# Altium PCB mainpcb.PcbDoc
Units mil, origin at the board's own origin, x right, y up, seen from the top; angles counter-clockwise.
Board outline 1960.42 x 1966.85 mil, 2 copper layers (Top Layer, Bottom Layer); 84 components, 58 nets, 271 pads, 70 vias.
Unrouted connection lines stored in the file: 12.
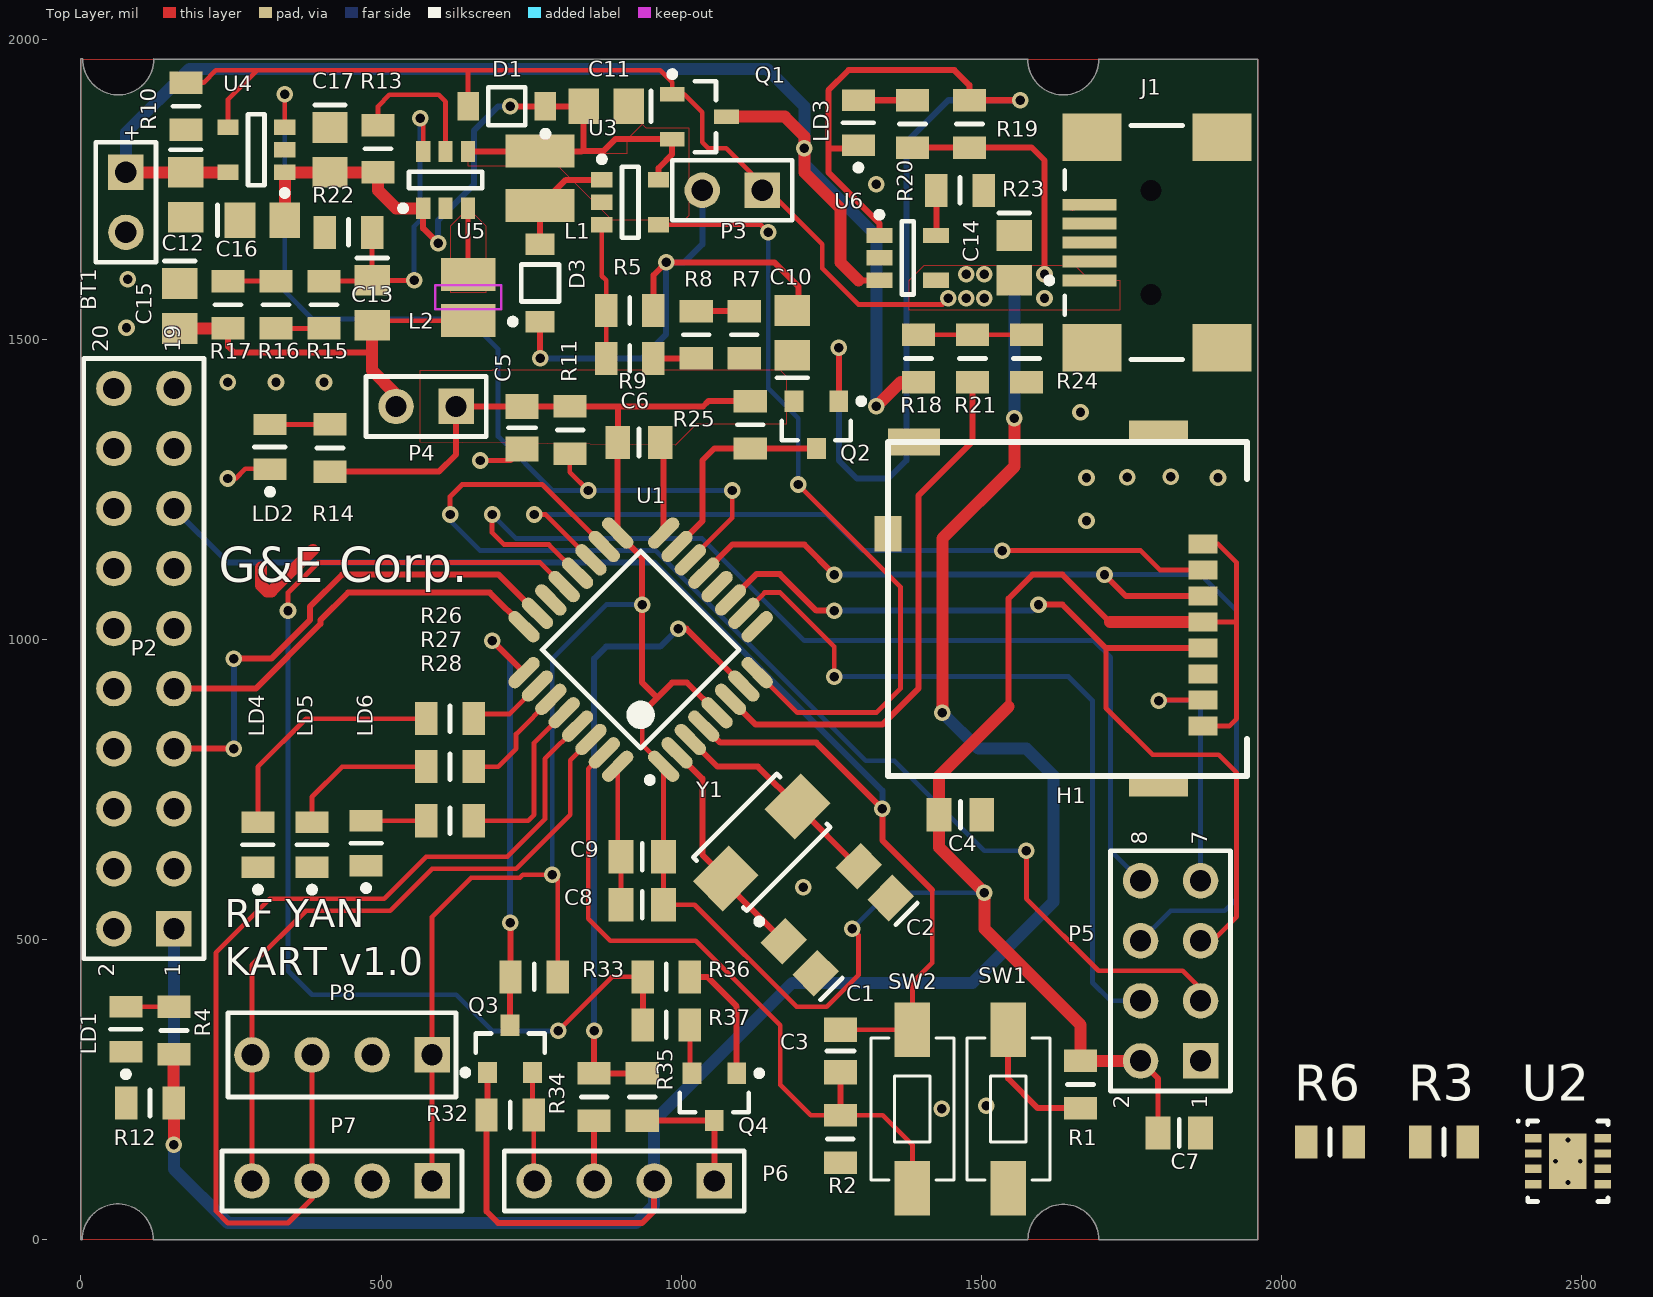
[diagram p0: Top Layer view]
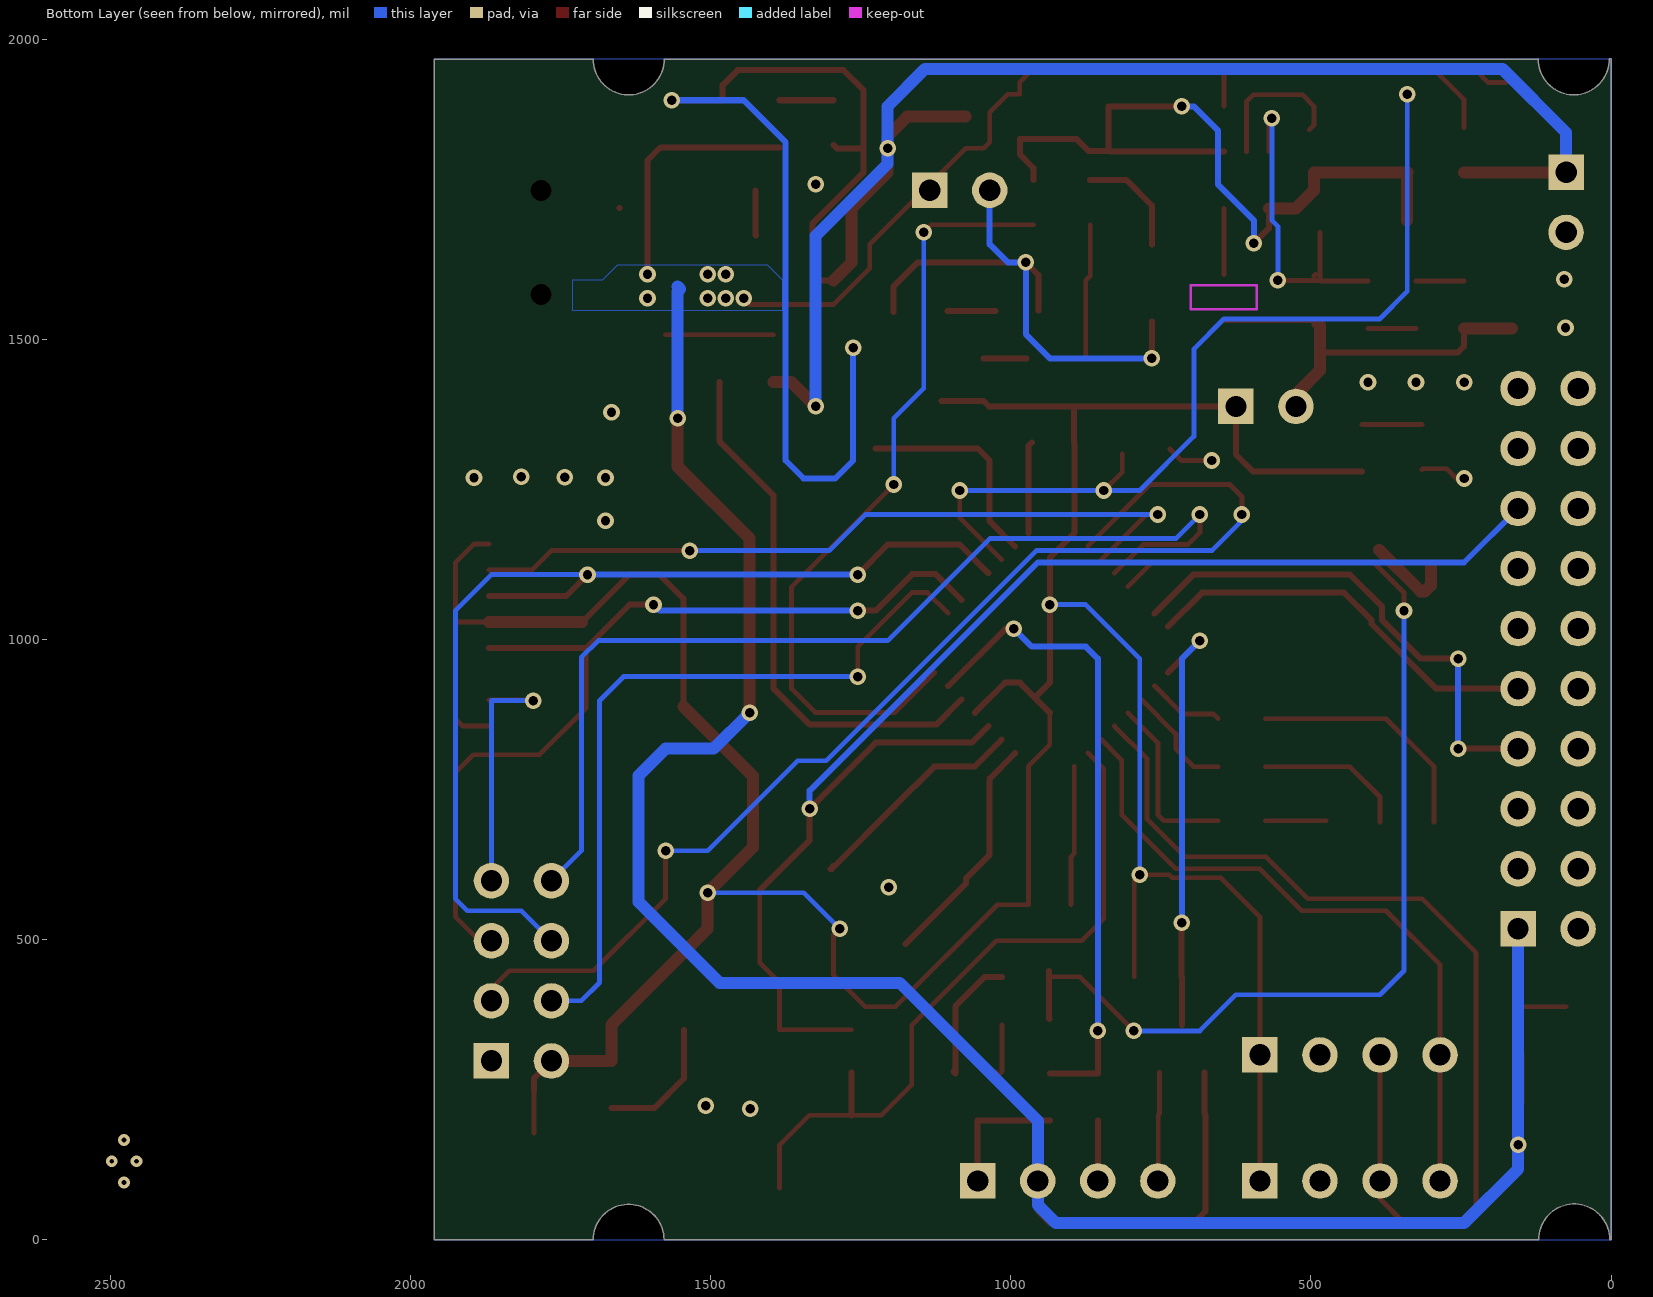
[diagram p1: Bottom Layer view, seen from below]
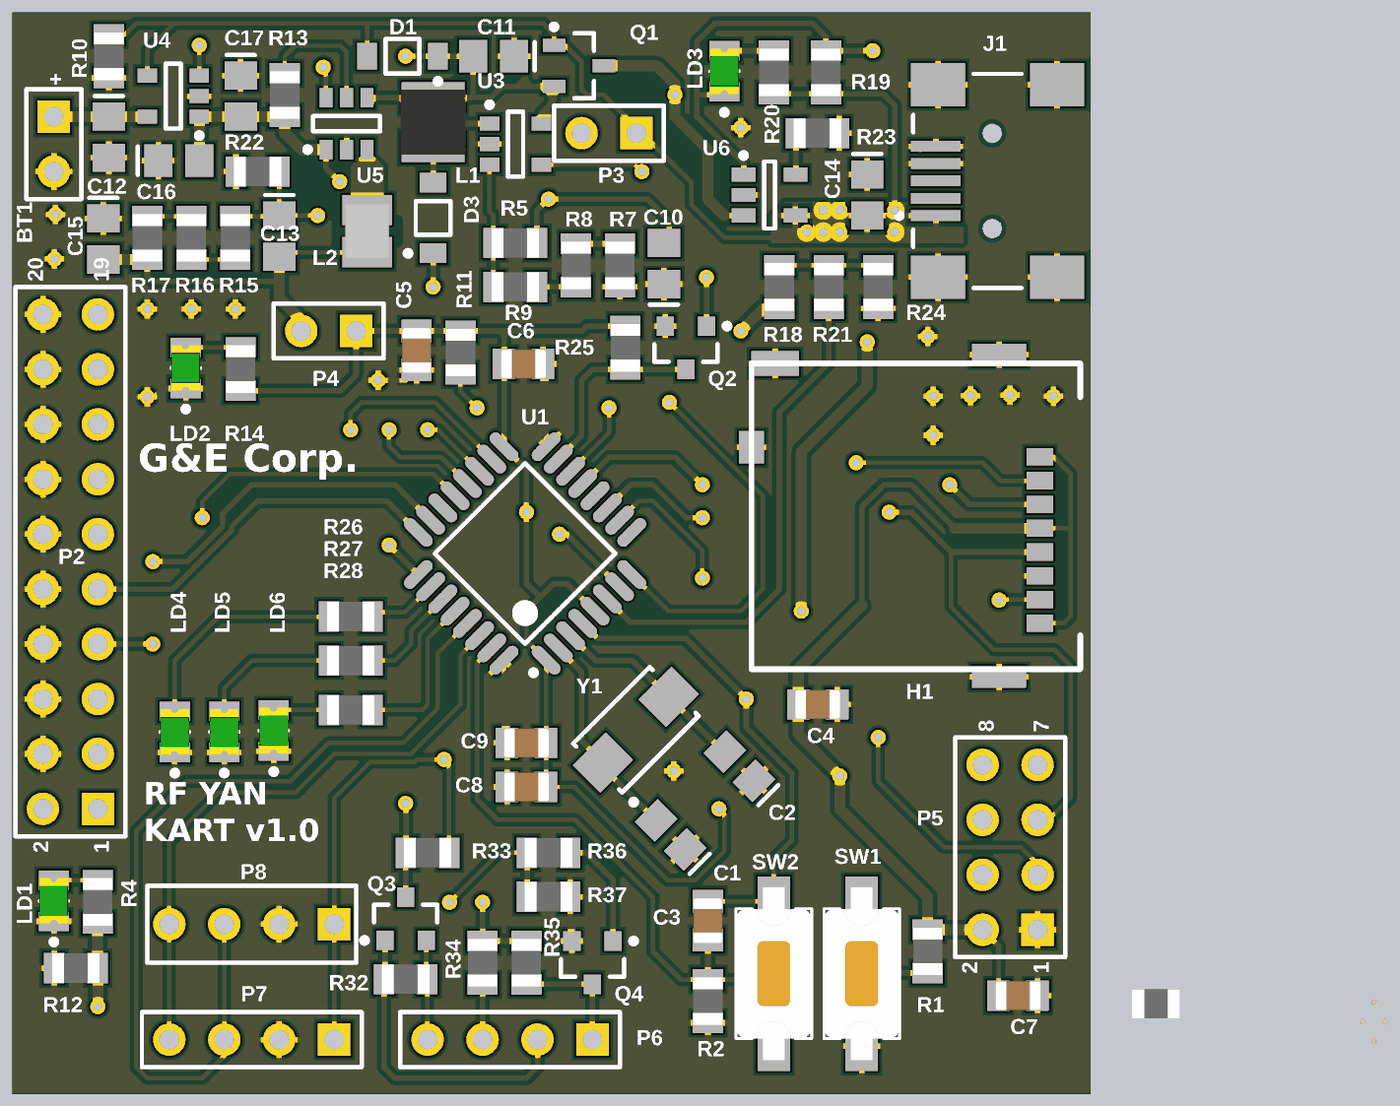
[diagram p2: 3D render of the assembled board from above, using the file's embedded part models]

## Layer stack, top to bottom
Top Solder: solder mask 0.4, Solder Resist, Dk 3.5
Top Layer: signal copper 1.4
Dielectric 1: dielectric 12.6, FR-4, Dk 4.8
Bottom Layer: signal copper 1.4
Bottom Solder: solder mask 0.4, Solder Resist, Dk 3.5

## Board outline
0,0 0,1966.75 -0.02,1966.78 2.99,1966.78 ccw(c62.09,1966.15) 121.19,1966.78 121.26,1966.7 1577.13,1966.7 ccw(c1636.23,1966.07) 1695.32,1966.7 1960.4,1966.7 1960.4,-0.07 1695.47,-0.07 1695.4,0.01 ccw(c1636.3,0.01) 1577.2,0.01 1577.12,0 120.5,0 ccw(c61.4,0.63) 2.31,0

## Design rules (kind name [scope] priority, off if disabled: settings)
Clearance Clearance_4 [InNamedPolygon('NONET_L01_P018')] p1: gap=8 ignorepadtopadclearanceinfootprint=FALSE
Clearance Clearance_2 [InNamedPolygon('GND_L02_P015')] p2: gap=8 ignorepadtopadclearanceinfootprint=FALSE
Clearance Clearance_3 [InNamedPolygon('NONET_L01_P013')] p3: gap=8 ignorepadtopadclearanceinfootprint=FALSE
Clearance Clearance_1 [InNamedPolygon('NONET_L01_P000')] p4: gap=7 ignorepadtopadclearanceinfootprint=FALSE
Clearance [All] p5: gap=7 ignorepadtopadclearanceinfootprint=FALSE
ComponentClearance [All] p1: gap=1 collisioncheckmode=3 verticalgap=10 showdistances=FALSE
MinimumSolderMaskSliver [All] p1: minsoldermaskwidth=0
PolygonConnect PolygonConnect_4 [All vs IsNamedPolygon('NONET_L01_P013')] p1: connectstyle=Relief reliefconductorwidth=10 reliefentries=4 polygonreliefangle="90 Angle" airgapwidth=8
PolygonConnect PolygonConnect_3 [All vs IsNamedPolygon('NONET_L01_P018')] p2: connectstyle=Relief reliefconductorwidth=10 reliefentries=4 polygonreliefangle="90 Angle" airgapwidth=8
PolygonConnect PolygonConnect_2 [All vs IsNamedPolygon('NETC13_2_L01_P010')] p3: connectstyle=Relief reliefconductorwidth=10 reliefentries=4 polygonreliefangle="90 Angle" airgapwidth=7
PolygonConnect PolygonConnect_1 [All vs IsNamedPolygon('GND_L01_P006')] p4: connectstyle=Relief reliefconductorwidth=10 reliefentries=4 polygonreliefangle="90 Angle" airgapwidth=10
PolygonConnect [All vs IsNamedPolygon('VBAT_L01_P003')] p5: thpad.connectstyle=Direct thpad.reliefconductorwidth=10 thpad.reliefentries=4 thpad.polygonreliefangle="90 Angle" thpad.airgapwidth=10 smdpad.connectstyle=Relief smdpad.reliefconductorwidth=7 smdpad.reliefentries=4 smdpad.polygonreliefangle="90 Angle" smdpad.airgapwidth=7 via.connectstyle=Relief via.reliefconductorwidth=10 via.reliefentries=4 via.polygonreliefangle="90 Angle" via.airgapwidth=10
PolygonConnect PolygonConnect_7 [All vs IsNamedPolygon('NONET_L01_P000')] p6: thpad.connectstyle=Direct thpad.reliefconductorwidth=10 thpad.reliefentries=4 thpad.polygonreliefangle="90 Angle" thpad.airgapwidth=10 smdpad.connectstyle=Relief smdpad.reliefconductorwidth=10 smdpad.reliefentries=4 smdpad.polygonreliefangle="90 Angle" smdpad.airgapwidth=10 via.connectstyle=Direct via.reliefconductorwidth=10 via.reliefentries=4 via.polygonreliefangle="90 Angle" via.airgapwidth=10
RoomDefinition Designator_2 [InComponentClass('Designator')] p1: confinementstyle=ConfineIn formatcopy=TRUE lockcomponents=FALSE outline -5825.2,-4042 -3825.2,-4042 -3825.2,-3042 -5825.2,-3042
RoomDefinition Designator_1 [InComponentClass('Designator')] p2: confinementstyle=ConfineIn formatcopy=TRUE lockcomponents=FALSE outline -5825.2,-4042 -3825.2,-4042 -3825.2,-3042 -5825.2,-3042
RoomDefinition Designator [InComponentClass('Designator')] p3: confinementstyle=ConfineIn formatcopy=TRUE lockcomponents=FALSE outline -5825.2,-4042 -3825.2,-4042 -3825.2,-3042 -5825.2,-3042
RoutingVias [All] p1: holewidth=28 width=50 viastyle="Through Hole" minholewidth=28 minwidth=50 maxholewidth=28 maxwidth=50
SilkToSilkClearance [All] p1: silktosilkclearance=2
SilkToSolderMaskClearance [IsPad] p1: minsilkscreentomaskgap=0 clearancetoexposedcopper=FALSE
SolderMaskExpansion [All] p1: expansion=4
Width [All] p1: maxlimit=50 minlimit=6 preferedwidth=20 minimp=50.000000 maximp=50.000000 favimp=50.000000
26 further rules are at their usual default settings.

## Classes and differential pairs
component class Designator: H1 K1 P5 P6 P7 P8 Q3 Q4 R32 R33 R34 R35 R36 R37

## Components (designator, comment, footprint, x,y, rotation, side; value= is the part's Value field where it differs from the comment)
BT1 "Battery" BAT-2 74.8,1728 r270 top
C1 "C0805" 0805 1197.07,470.73 r135 top value=18pF
C2 "C0805" 0805 1322.07,595.73 r135 top value=18pF
C3 "22pF" CAPC2012X135N 1264.8,314.46 r90 top
C4 "100nF" CAPC2012X135N 1464.8,708 r180 top
C5 "100nF" CAPC2012X135N 734.8,1352.57 r90 top
C6 "100nF" CAPC2012X135N 929.37,1328 r180 top
C7 "100nF" CAPC2012X135N 1829.37,178 r180 top
C8 "100nF" CAPC2012X135N 934.8,558 r0 top
C9 "100nF" CAPC2012X135N 934.8,638 r0 top
C10 "C0805" 0805 1184.8,1510.6 r90 top value=10uF
C11 "C0805" 0805 874.8,1888 r180 top value=10uF
C12 "C0805" 0805 302.2,1698 r0 top value=10uF
C13 "C0805" 0805 484.8,1560.6 r270 top value=22pF
C14 "C0805" 0805 1554.8,1635.4 r270 top value=10uF
C15 "C0805" 0805 164.8,1555.4 r270 top value=10uF
C16 "C0805" 0805 174.8,1740.6 r270 top value=10uF
C17 "C0805" 0805 414.8,1815.4 r270 top value=10uF
D1 "PMEG2010AEH" ONSC-SOD-123-2-425-04_V 709.17,1888 r180 top
D3 "PMEG2010AEH" ONSC-SOD-123-2-425-04_V 764.8,1593.63 r90 top
H1 "SDKART" PCBComponent_1 1394.01,1328.87 r270 top
J1 "440478-2" 440478 1988.85,1660.99 r0 top
L1 "74404032047" "WE-LQS 3015" 764.8,1768 r270 top
L2 "74438322022" "SMD 2508" 644.8,1569.61 r270 top
LD1 "Green" LED_OSRAM_LGR971 74.8,350.6 r90 top
LD2 "Green" LED_OSRAM_LGR971 314.8,1320.6 r90 top
LD3 "Green" LED_OSRAM_LGR971 1294.8,1860.6 r90 top
LD4 "Green" LED_OSRAM_LGR971 294.8,658 r90 top
LD5 "Green" LED_OSRAM_LGR971 384.8,658 r90 top
LD6 "Green" LED_OSRAM_LGR971 474.8,660.6 r90 top
P2 "Header 10X2" HDR2X10 154.8,518 r90 top
P3 "Header 2" HDR1X2 1134.8,1748 r180 top
P4 "Header 2" HDR1X2 624.8,1388 r180 top
P5 "Header 4X2" HDR2X4 1864.8,298 r90 top
P6 "Header 4" HDR1X4 1054.8,98 r180 top
P7 "Header 4" HDR1X4 584.8,98 r180 top
P8 "Header 4H" HDR1X4H 584.8,308 r180 top
Q1 "BSS308PE" INF-PG-SOT23_N 1030.08,1870.6 r0 top
Q2 "MMBT3904LT1G" ONSC-SOT-23-3-318-08_V 1224.8,1357.37 r270 top
Q3 "BC817-25LT1" ONSC-SOT-23-3-318-08_V 714.8,318 r90 top
Q4 "BC817-25LT1" ONSC-SOT-23-3-318-08_V 1054.8,238 r270 top
R1 "1K" RESC2012X60N 1664.8,258.63 r90 top
R2 "1K" RESC2012X60N 1264.8,168 r90 top
R3 "26K" RESC2012X60N 2270.1,162.9 r0 top
R4 "1K" RESC2012X60N 154.8,348.63 r270 top
R5 "100K" RESC2012X60N 914.17,1548 r180 top
R6 "1K2" RESC2012X60N 2080.3,162.9 r0 top
R7 "10K" RESC2012X60N 1104.8,1507.37 r270 top
R8 "1K" RESC2012X60N 1024.8,1507.37 r270 top
R9 "100R" RESC2012X60N 914.17,1468 r0 top
R10 "1K2" RESC2012X60N 174.8,1888 r90 top
R11 "10K" RESC2012X60N 814.8,1348.63 r270 top
R12 "1K2" RESC2012X60N 114.8,228 r180 top
R13 "1K2" RESC2012X60N 494.8,1817.37 r270 top
R14 "1K" RESC2012X60N 414.8,1318.63 r270 top
R15 "RC0805FR-07430KL" RESC2012X60N 404.8,1557.37 r90 top value=150K
R16 "150K" RESC2012X60N 324.8,1557.37 r90 top
R17 "150K" RESC2012X60N 244.8,1557.37 r90 top
R18 "100K" RESC2012X60N 1394.8,1468 r270 top
R19 "1K" RESC2012X60N 1479.8,1858.63 r270 top
R20 "1K" RESC2012X60N 1384.8,1858.63 r270 top
R21 "1K" RESC2012X60N 1484.8,1468 r90 top
R22 "100K" RESC2012X60N 445.43,1678 r180 top
R23 "2K2" RESC2012X60N 1464.17,1748 r0 top
R24 "100K" RESC2012X60N 1574.8,1468 r90 top
R25 "1K" RESC2012X60N 1114.8,1357.37 r270 top
R26 "1K" RESC2012X60N 614.8,868 r0 top
R27 "1K" RESC2012X60N 614.8,788 r0 top
R28 "1K" RESC2012X60N 614.8,698 r0 top
R32 "4k7" RESC2012X60N 714.8,208 r180 top
R33 "4k7" RESC2012X60N 754.8,438 r0 top
R34 "4k7" RESC2012X60N 854.8,238 r270 top
R35 "4k7" RESC2012X60N 934.8,238 r270 top
R36 "4k7" RESC2012X60N 974.8,438 r180 top
R37 "4k7" RESC2012X60N 974.8,358 r0 top
SW1 "434111043826" 434111043826 1544.8,218 r90 top
SW2 "434111043826" 434111043826 1384.8,218 r90 top
U1 "STM32F030K6T6" STM-LQFP32_N 932.16,982.91 r135 top
U2 "MAX8586ETA+T" T833+2 2476.6,130.9 r0 top
U3 "MIC2288" TSOT25 914.8,1728 r0 top
U4 "AP22802" TSOT25 292.04,1815.4 r180 top
U5 "AP3401" TSOT26 607.4,1765.24 r90 top
U6 "MCP73832T-2DFI/OT" SOT-23-OT5_N 1377.04,1635.4 r0 top
Y1 "4SMX" 4SMX 1133.8,662 r45 top

## Footprints (in the part's own frame and the unit in brackets; to place one, negate y for a bottom-side part, rotate by r counter-clockwise, add the part's x,y. Pads: shape width x height; smd on the part's side, far side on the other; paste and mask are expansions set on the pad)
4SMX [mm] "Surface Mount Quartz Crystal; Body 5.2 x 3.4 mm (LxW max)"
  rect 2.159x1.8 smd: 1(-2.15,0) 2(2.15,0)
  silkscreen extent -2.57,-2.42 2.5,1.6
0805 [mm] "Chip Capacitor; Body 2.0 x 1.2 mm (LxW typ)"
  rect 1.3x1.5 smd: 1(-0.95,0) 2(0.95,0)
  silkscreen extent -1.9,-0.65 -1.9,0.65
440478 [mm] "Connector; USB2.0, Type A, SM; 5 Position; Right Angle"
  rect 2.3x0.5 smd: 1(-7.85,-1.6) 2(-7.85,-0.8) 3(-7.85,0) 4(-7.85,0.8) 5(-7.85,1.6)
  rect 2.5x2 smd: 6(-7.75,4.45) 7(-2.25,4.45) 8(-7.75,-4.45) 9(-2.25,-4.45)
  round 0.6 hole 0.9 unplated: MH1(-5.25,2.2) MH2(-5.25,-2.2)
  silkscreen extent -9.67,-4.95 -3.9,4.95
434111043826 [mm] "6.0*3.5mm vertical type, SMD, height 4.3mm, white actuator, 260gf, T&R"
  rect 2.3x1.5 smd: 1(-3.35,0) 2(3.35,0)
  silkscreen extent -3,-1.75 3,1.75, body extent -4,-1.75 4,1.75, height 4.3
BAT-2 [mm] "Battery; 2 Leads"
  rect 1.5x1.5 hole 0.9: 1(-1.27,0)
  round 1.5 hole 0.9: 2(1.27,0)
  silkscreen extent -2.54,-1.27 2.54,1.27
CAPC2012X135N [mm] "Chip Capacitor, Body 2.0x1.25mm, IPC Medium Density"
  rect 1.05x1.4 smd: 1(-0.9,0) 2(0.9,0)
  silkscreen extent 0,-0.58 0,0.58, body extent -1.05,-0.67 1.05,0.68, height 1.25
HDR1X2 [mm] "Connector; Header; 2 Position"
  rect 1.5x1.5 hole 0.9: 1(0,0)
  round 1.5 hole 0.9: 2(2.54,0)
  silkscreen extent -1.27,-1.27 3.81,1.27
HDR1X4 [mm] "Connector; Header; 4 Position"
  rect 1.5x1.5 hole 0.9: 1(0,0)
  round 1.5 hole 0.9: 2(2.54,0) 3(5.08,0) 4(7.62,0)
  silkscreen extent -1.27,-1.27 8.89,1.27
HDR1X4H [mm] "Connector; Header; 4 Position; Right Angle"
  rect 1.5x1.5 hole 0.9: 1(0,0)
  round 1.5 hole 0.9: 2(2.54,0) 3(5.08,0) 4(7.62,0)
  silkscreen extent -1.02,-1.78 8.64,1.78
HDR2X4 [mm] "Connector; Header; 4x2 Position"
  rect 1.5x1.5 hole 0.9: 1(0,0)
  round 1.5 hole 0.9: 2(0,2.54) 3(2.54,0) 4(2.54,2.54) 5(5.08,0) 6(5.08,2.54) 7(7.62,0) 8(7.62,2.54)
  silkscreen extent -1.27,-1.27 8.89,3.81
HDR2X10 [mm] "Connector; Header; 10x2 Position"
  rect 1.5x1.5 hole 0.9: 1(0,0)
  round 1.5 hole 0.9: 2(0,2.54) 3(2.54,0) 4(2.54,2.54) 5(5.08,0) 6(5.08,2.54) 7(7.62,0) 8(7.62,2.54) 9(10.16,0) 10(10.16,2.54) 11(12.7,0) 12(12.7,2.54) 13(15.24,0) 14(15.24,2.54) 15(17.78,0) 16(17.78,2.54) 17(20.32,0) 18(20.32,2.54) 19(22.86,0) 20(22.86,2.54)
  silkscreen extent -1.27,-1.27 24.13,3.81
INF-PG-SOT23_N [mm] "SOT23, 3-Leads, Body 2.9x1.3mm, Pitch 0.95mm, IPC Medium Density"
  rect 1.05x0.6 smd: 1(-1.15,0.95) 2(-1.15,-0.95) 3(1.15,0)
  silkscreen extent -1.27,-1.5 0.7,1.92, body extent -0.7,-1.5 0.7,1.5, height 1.1
LED_OSRAM_LGR971 [mm] "Green Chip LED, 2-Leads, Body 2.0x1.25mm, IPC Medium Density"
  rect 0.9x1.4 smd: 1(-0.95,0) 2(0.95,0)
  silkscreen extent -2.02,-0.65 0,0.65, body extent -1.05,-0.67 1.05,0.68, height 0.9
ONSC-SOD-123-2-425-04_V [mm] "SOD, 2-Leads, Body 2.69x1.6mm"
  rect 0.91x1.22 smd: 1(-1.635,0) 2(1.635,0)
  silkscreen extent -1.76,-0.8 0.78,1.28, body extent -1.35,-0.8 1.35,0.8, height 1.35
ONSC-SOT-23-3-318-08_V [mm] "SOT23, 3-Leads, Body 2.92x1.3mm, Pitch 0.95mm"
  rect 0.9x0.8 smd: 1(-1,0.95) 2(-1,-0.95) 3(1,0)
  silkscreen extent -1.12,-1.46 0.65,2.03, body extent -0.65,-1.46 0.65,1.46, height 1.11
PCBComponent_1 [mm]
  rect 0.8x1.24 smd: 1(4.32,12.06) 2(5.42,12.06) 3(6.52,12.06) 4(7.62,12.06) 5(8.72,12.06) 6(9.82,12.06) 7(10.92,12.06) 8(12.02,12.06)
  rect 1x2.5 smd: 6(-0.4,10.18) 6(14.5,10.18)
  rect 1.15x2.2 smd: 6(0,-0.17)
  rect 1.5x1.15 smd: 6(3.88,-1.27)
  silkscreen extent 0,-1.27 14.14,13.93
RESC2012X60N [mm] "Chip Resistor, EIA 0805, Metric 2012, Body 2.0x1.2mm, IPC Medium Density"
  rect 0.95x1.4 smd: 1(-1,0) 2(1,0)
  silkscreen extent 0,-0.55 0,0.55, body extent -1.1,-0.67 1.1,0.68, height 0.6
"SMD 2508" [mm] "Chip Inductor, 2-Leads, Body 2.5x2.0mm, IPC Medium Density"
  rect 1.4x2.3 smd: 1(-0.975,0) 2(0.975,0)
  Keep-Out Layer lines w0.1: 0.508,-1.397 -0.508,-1.397 -0.508,1.397 0.508,1.397 0.508,-1.397
  body extent -1.25,-1 1.25,1, height 0.8
SOT-23-OT5_N [mm] "SOT23, 5-Leads, Body 2.9x1.6mm, Pitch 0.95mm, Lead Span 2.7mm, IPC Medium Density"
  rect 1.1x0.65 smd: 1(-1.2,0.95) 2(-1.2,0) 3(-1.2,-0.95) 4(1.2,-0.95) 5(1.2,0.95)
  silkscreen extent -1.32,-1.55 0.25,1.95, body extent -0.9,-1.55 0.9,1.55, height 1.45
STM-LQFP32_N [mm] "QFP, 32-Leads, Body 7x7mm, Pitch 0.8mm, IPC Medium Density"
  oval 1.65x0.55 smd: 1(-4.175,2.8) 2(-4.175,2) 3(-4.175,1.2) 4(-4.175,0.4) 5(-4.175,-0.4) 6(-4.175,-1.2) 7(-4.175,-2) 8(-4.175,-2.8) 17(4.175,-2.8) 18(4.175,-2) 19(4.175,-1.2) 20(4.175,-0.4) 21(4.175,0.4) 22(4.175,1.2) 23(4.175,2) 24(4.175,2.8)
  oval 0.55x1.65 smd: 9(-2.8,-4.175) 10(-2,-4.175) 11(-1.2,-4.175) 12(-0.4,-4.175) 13(0.4,-4.175) 14(1.2,-4.175) 15(2,-4.175) 16(2.8,-4.175) 25(2.8,4.175) 26(2,4.175) 27(1.2,4.175) 28(0.4,4.175) 29(-0.4,4.175) 30(-1.2,4.175) 31(-2,4.175) 32(-2.8,4.175)
  silkscreen extent -4.3,-2.95 2.95,3.75, body extent -3.5,-3.5 3.5,3.5, height 1.6
T833+2 [mm] "SON, 8-Leads, Body 3x3 mm, Pitch 0.65mm, Thermal Pad 2.35x1.58mm, Maxim Recommended"
  rect 0.7x0.35 smd: 1(-1.475,0.975) 2(-1.475,0.325) 3(-1.475,-0.325) 4(-1.475,-0.975) 5(1.475,-0.975) 6(1.475,-0.325) 7(1.475,0.325) 8(1.475,0.975)
  rect 1.58x2.35 smd: 9(0,0)
  silkscreen extent -2.15,-1.7 1.7,1.75, body extent -1.55,-1.55 1.55,1.55, height 0.8
TSOT25 [mm]
  rect 0.9x0.65 smd: 1(-1.2,0.95) 2(-1.2,0) 3(-1.2,-0.95) 4(1.2,-0.95) 5(1.2,0.95)
  silkscreen extent -1.32,-1.5 0.35,1.95, body extent -0.85,-1.5 0.85,1.5, height 1.1
TSOT26 [mm]
  rect 0.9x0.6 smd: 1(-1.2,0.95) 2(-1.2,0) 3(-1.2,-0.95) 4(1.2,-0.95) 5(1.2,0) 6(1.2,0.95)
  silkscreen extent -1.32,-1.55 0.35,1.92, body extent -0.9,-1.55 0.9,1.55, height 1.45
"WE-LQS 3015" [mm] "SMD Power Inductor, 2-Leads, Body 3.0x3.0mm"
  rect 1.4x2.921 smd: 1(-1.15,0) 2(1.15,0)
  body extent -1.5,-1.5 1.5,1.5, height 1.5

## Part data
BT1: "Multicell Battery", LatestRevisionDate=17-Jul-2002, LatestRevisionNote="Re-released for DXP Platform.", PackageDescription="Battery; 2 Leads", PackageReference=BAT-2, Published=24-Mar-1999, Publisher="Altium Limited"
C1 C2 C10 C11 C12 C13 C14 C15 C16 C17: "Ceramic Chip Capacitor - Standard", PackageDocument=Mar-2001, Code_IPC=2012[0805], Code_JEITA=0805, ComponentLink1Description="Manufacturer Link", ComponentLink1URL=http://www.kemet.com/, ComponentLink2Description=Datasheet, ComponentLink2URL=http://www.kemet.com/kemet/web/homepage/kechome.nsf/vapubfilesname/F3102TA.pdf/$file/F3102TA.pdf, DatasheetDocument=Mar-2001, LatestRevisionDate=19-Mar-2004, LatestRevisionNote="Silkscreen size reduced.", Note="Footprint corresponds to dimensions for bulk cassette packaging. This case size has tightened tolerances.", PackageReference=0805, Published=17-Jul-2002, Publisher="Altium Limited"
C3: library part CC0805_10NF_50V_10%_X7R, "Non-polarised capacitor", Case=0805, Manufacturer=GENERIC, Manufacturer1 ComponentHeight=1.35mm, Manufacturer1 Example=EPCOS, Manufacturer1 Part Number=B37941K5103K60, Tolerance=±10%, Voltage=50V, Author="CERN DEM JLC", Component Type=Standard, CreateDate=03.12.2007, HelpURL=\\cern.ch\dfs\Applications\Altium\Datasheets\CC0805_X7R_EPCOS.pdf, LatestRevisionDate=03.12.2007, Manufacturer Part Number=CC0805_10NF_50V_10%_X7R, Mounted=Yes, Part Description="SMD Multilayer Chip Ceramic Capacitor", Part Number=CC0805_10NF_50V_10%_X7R, Pin Count=2, SMD=Yes, Socket=No, Status=Preferred, Table="Capacitors SMD", TC=X7R
C4 C5 C6 C7 C8 C9: library part CC0805_1NF_50V_5%_X7R, "Non-polarised capacitor", Case=0805, Manufacturer=GENERIC, Manufacturer1 ComponentHeight=0.94mm, Manufacturer1 Example=AVX, Manufacturer1 Part Number=08055C102JAT2A, Tolerance=±5%, Voltage=50V, Author="CERN DEM JLC", Component Type=Standard, CreateDate=18.01.2011, HelpURL=\\cern.ch\dfs\Applications\Altium\Datasheets\CC0805_X7R_AVX.pdf, LatestRevisionDate=18.01.2011, Manufacturer Part Number=CC0805_1NF_50V_5%_X7R, Mounted=Yes, Part Description="SMD Multilayer Chip Ceramic Capacitor", Part Number=CC0805_1NF_50V_5%_X7R, Pin Count=2, SMD=Yes, Socket=No, Status=None, Table="Capacitors SMD", TC=X7R
D1 D3: library part MMSD914T3G, "Switching Diode, 2-Pin SOD-123, Pb-Free, Tape and Reel", Manufacturer="On Semiconductor", Supplier Part Number 1=MMSD914T3G-ND, ComponentLink1Description="Manufacturer URL", ComponentLink1URL=http://www.onsemi.com/, ComponentLink2Description=Datasheet, ComponentLink2URL=http://www.onsemi.com/pub_link/Collateral/MMSD914T1-D.PDF, ComponentLink3Description="Package Specification", ComponentLink3URL=http://www.onsemi.com/pub_link/Collateral/425-04.PDF, Configuration=Single, DatasheetVersion="Rev. 11", IF Max (A)=0.2, Mounting Technology="Surface Mount", PackageDescription="2-Pin SOD, Body 1.6 x 2.69 mm", PackageReference=SOD-123-2-425-04, PackageVersion="Rev. G, 10/2009", Packing="Tape and Reel", PartNumber=MMSD914T3G, RoHS=TRUE, Supplier 1=Digi-Key, Supplier 2=Newark, Supplier 3=Mouser, Supplier Part Number 2=42K1367, Supplier Part Number 3=863-MMSD914T3G, trr Max (ns)=4
J1: "USB 2.0, Right Angle, SMT, A Type, Receptacle, 5 Position, Black", PackageDocument=15-Nov-2002, ComponentLink1Description="Manufacturer Link", ComponentLink1URL=http://www.tycoelectronics.com/, ComponentLink2Description="Packaging Specification", ComponentLink2URL=http://ecommas.tycoelectronics.com/commerce/DocumentDelivery/DDEController?Action=showdoc&DocId=Customer+Drawing%7F440478%7FB%7Fpdf%7FEnglish%7FC_440478_B.pdf, ContactMaterial="Phosphor Bronze", ContactPlating="Gold (30) over Nickel", DatasheetDocument=15-Nov-2002, DrillSize="Corresponds to nominal value.", HousingMaterial=Thermoplastic, PackageReference=440478, PanelGround=Without, PCB_Layout="Complies with manufacturer's recommendation.", Published=15-Jul-2004, Publisher="Altium Limited"
L1: "WE-LQS SMD Power Inductor, L=4.7 µH", Inductance="4.7 µH", ComponentLink1Description="Manufacturer URL", ComponentLink1URL=http://www.we-online.com, ComponentLink2Description=Datasheet, ComponentLink2URL=http://katalog.we-online.de/pbs/datasheet/74404032047.pdf, PackageReference="WE-LQS 3015", PartNumber=74404032047
L2: "Power Multilayer Inductor WE-MAPI, L=2.2µH", Inductance=2.2µH, ComponentLink1Description="Manufacturer URL", ComponentLink1URL=http://www.we-online.com, ComponentLink2Description=Datasheet, ComponentLink2URL=http://katalog.we-online.de/kataloge/eisos/media/pdf/74438322022.pdf, PackageReference="SMD 2508", PartNumber=74438322022
LD1 LD2 LD3 LD4 LD5 LD6: library part LED_OSRAM_LGR971, "LED Green 1C 2A", Case=0805, Manufacturer=OSRAM, Manufacturer Part Number=LGR971, Author="CERN DEM JLC", Color=Green, ComponentHeight=0.9mm, Component Type=Standard, CreateDate=28.01.2009, HelpURL=\\cern.ch\dfs\Applications\Altium\Datasheets\LED_OSRAM_LGR971.pdf, LatestRevisionDate=17.03.2010, Mounted=Yes, PackageDescription="Green Chip LED, 2-Leads, Body 2.0x1.25mm, IPC Medium Density", Part Description="Surface Mount Green LED (0805 Case)", Part Number=LED_OSRAM_LGR971, Pin Count=2, SMD=Yes, Socket=No, Table="LEDs & Displays"
P2: "Header, 10-Pin, Dual row", LatestRevisionDate=17-Jul-2002, LatestRevisionNote="Re-released for DXP Platform.", Publisher="Altium Limited"
P3 P4: "Header, 2-Pin", LatestRevisionDate=17-Jul-2002, LatestRevisionNote="Re-released for DXP Platform.", Publisher="Altium Limited"
P5: "Header, 4-Pin, Dual row", LatestRevisionDate=17-Jul-2002, LatestRevisionNote="Re-released for DXP Platform.", Publisher="Altium Limited"
P6 P7: "Header, 4-Pin", LatestRevisionDate=17-Jul-2002, LatestRevisionNote="Re-released for DXP Platform.", Publisher="Altium Limited"
P8: "Header, 4-Pin, Right Angle", LatestRevisionDate=17-Jul-2002, LatestRevisionNote="Re-released for DXP Platform.", Publisher="Altium Limited"
Q1: "P-Channel OptiMOS P3 Small-Signal-Transistor, -30 V VDS, -2 A ID, -55 to 150 degC, PG-SOT23, Reel, Green", Manufacturer=Infineon, ComponentLink1Description="Manufacturer URL", ComponentLink1URL=http://www.infineon.com/, ComponentLink2Description=Datasheet, ComponentLink2URL=http://www.infineon.com/dgdl/BSS308PE_Rev23_.pdf?folderId=db3a304314dca38901154a72e3951a65&fileId=db3a304330f686060131099c80400073, ComponentLink3Description="Package Specification", ComponentLink3URL=http://www.infineon.com/dgdl/SOT23-Package_Overview.pdf?folderId=db3a30431936bc4b0119532290053c66&fileId=db3a30431936bc4b0119533468123c85, DatasheetVersion="Rev. 2.03", Green=TRUE, Halogen-free=TRUE, ID (max)="-2 A", IDpuls (max)="-8 A", Mounting Technology="Surface Mount", PackageDescription="3-Pin Small Outline Transistor Package, 2.9 x 1.3 mm Body, 0.95 mm Pitch", PackageReference=PG-SOT23, PackageVersion=Apr-08, Packing=Reel, PartNumber=BSS308PE, Pto t (max)="0.5 W", QG="-5 nC", RDS (on) (max)="80 mOhm", RDS (on) (max) (@4.5V)="130 mOhm", Rth="250 K/W", VDS (max)="-30 V", VGS(th) (max)="-1 V", VGS(th) (min)="-2 V"
Q2: "General Purpose Transistor, NPN Silicon, 3-Pin SOT-23, Pb-Free, Tape and Reel", Manufacturer="On Semiconductor", Supplier Part Number 1=MMBT3904LT1GOSTR-ND, Supplier Part Number 10=863-MMBT3904LT1G, ComponentLink1Description="Manufacturer URL", ComponentLink1URL=http://www.onsemi.com/, ComponentLink2Description=Datasheet, ComponentLink2URL=http://www.onsemi.cn/pub_link/Collateral/MMBT3904LT1-D.PDF, ComponentLink3Description="Package Specification", ComponentLink3URL=http://www.onsemi.cn/pub_link/Collateral/318-08.PDF, DatasheetVersion="Rev. 12", fT Min (MHz)=300, IC Continuous (A)=0.2, Mounting Technology="Surface Mount", PackageDescription="3-Pin Small Outline Transistor, Body 2.92 x 1.3 mm, Pitch 0.95 mm", PackageReference=SOT-23-3-318-08, PackageVersion="Rev. AP, 11/2009", Packing="Tape and Reel", PartNumber=MMBT3904LT1G, Polarity=NPN, RoHS=TRUE, Supplier 1=Digi-Key, Supplier 2=Digi-Key, Supplier 3=Digi-Key, Supplier 4=Farnell, Supplier 5=Farnell, Supplier 6=Farnell, Supplier 7=Newark, Supplier 8=Newark, Supplier 9=Newark, Supplier 10=Mouser, Supplier Part Number 2=MMBT3904LT1GOSCT-ND, Supplier Part Number 3=MMBT3904LT1GOSDKR-ND, Supplier Part Number 4=2317804, Supplier Part Number 5=1459100, Supplier Part Number 6=1459100RL, Supplier Part Number 7=83K0942, Supplier Part Number 8=83H7337, Supplier Part Number 9=28X7922
Q3 Q4: "General Purpose Transistor, NPN Silicon, 3-Pin SOT-23, Tape and Reel", Manufacturer="On Semiconductor", Supplier Part Number 1=BC817-25LT1OSCT-ND, ComponentLink1Description="Manufacturer URL", ComponentLink1URL=http://www.onsemi.com/, ComponentLink2Description=Datasheet, ComponentLink2URL=http://www.onsemi.com/pub_link/Collateral/BC817-16LT1-D.PDF, ComponentLink3Description="Package Specification", ComponentLink3URL=http://www.onsemi.cn/pub_link/Collateral/318-08.PDF, DatasheetVersion="Rev. 12", fT Min (MHz)=100, IC Continuous (A)=0.5, Mounting Technology="Surface Mount", PackageDescription="3-Pin Small Outline Transistor, Body 2.92 x 1.3 mm, Pitch 0.95 mm", PackageReference=SOT-23-3-318-08, PackageVersion="Rev. AP, 11/2009", Packing="Tape and Reel", PartNumber=BC817-25LT1, Polarity=NPN, RoHS=FALSE, Supplier 1=Digi-Key
R1 R2 R3 R4 R5 R6 R7 R8 R9 R10 R11 R12 R13 R14 R15 R16 R17 R18 R19 R20 R21 R22 R23 R24 R25 R26 R27 R28 R32 R33 R34 R35 R36 R37: library part R0805_1K1_0.1%_0.1W_10PPM, "Resistor - 0.1%", Case=0805, Manufacturer=GENERIC, Manufacturer1 ComponentHeight=0.6mm, Manufacturer1 Example="TYCO HOLSWORTHY", Manufacturer1 Part Number=RN73C2A1K1BTG, Power=0.1W, Tolerance=±0.1%, Author="CERN DEM JLC", Component Type=Standard, CreateDate=03.12.2007, HelpURL=\\cern.ch\dfs\Applications\Altium\Datasheets\R0805_Tyco_RN73.pdf, LatestRevisionDate=13.03.2008, Manufacturer Part Number=R0805_1K1_0.1%_0.1W_10PPM, Mounted=Yes, Part Description="Thin Film Chip Resistor", Part Number=R0805_1K1_0.1%_0.1W_10PPM, Pin Count=2, SMD=Yes, Socket=No, Status="Not recommended", Table="Resistors SMD", TC=±10ppm
SW1 SW2: "WS-TASV SMD Tact Switch 6.0X3.5 mm", ComponentLink1Description="Manufacturer URL", ComponentLink1URL=http://www.we-online.com, ComponentLink2Description=Datasheet, ComponentLink2URL=http://katalog.we-online.de/em/datasheet/434111043826.pdf, NoPins=02, PackageReference=434111043826, PartNumber=434111043826
U1: "ARM Cortex-M0 32-bit MCU, 32 KB Flash, 4 KB Internal RAM, 26 I/Os, 32-pin LQFP, -40 to 85 degC, Tray", I/Os (High Current)=26, Operating Frequency(F) (Processor speed) (MHz)=48, Supplier Part Number 1=497-14046-ND, Supply Voltage(Vcc) min (V)=2.4, ComponentLink1Description="Manufacturer URL", ComponentLink1URL=http://www.st.com/web/en/home.html, ComponentLink2Description=Datasheet, ComponentLink2URL=http://www.st.com/st-web-ui/static/active/en/resource/technical/document/datasheet/DM00088500.pdf, ComponentLink3Description="Package Specification", ComponentLink3URL=http://www.st.com/st-web-ui/static/active/en/resource/technical/document/datasheet/DM00088500.pdf, Core="ARM Cortex-M0", DatasheetVersion="Rev. 1", FLASH Size (Prog) (kB)=32, Internal RAM Size (kB)=4, Mounting Technology="Surface Mount", PackageDescription="32-Pin Low Profile Quad Flat Package, 7 x 7 mm Body, 0.8 mm Pitch", PackageReference=LQFP32, PackageVersion="Rev. 1, 07/2013", Packing=Tray, PartNumber=STM32F030K6T6, Supplier 1=Digi-Key, Supplier 2=Newark, Supplier 3=Mouser, Supplier Part Number 2=19X6194, Supplier Part Number 3=511-STM32F030K6T6
U2: "Single 1.2A USB Switch, 8-Pin TDFN, -40°C to +85°C, Pb-Free, Tape and Reel", Code_JEDEC=MO-229-WEEC, ComponentLink1Description="Manufacturer URL", ComponentLink1URL=http://www.maxim-ic.com, ComponentLink2Description=Datasheet, ComponentLink2URL=http://datasheets.maxim-ic.com/en/ds/MAX8586.pdf, ComponentLink3Description="Package Specification", ComponentLink3URL=http://pdfserv.maxim-ic.com/package_dwgs/21-0137.PDF, DatasheetVersion="Rev 2, Jan-2010", PackageDescription="8-Pin Plastic Very Very Thin Dual Flatpack No Leads, Exposed Pad, 3 x 3 x 0.8 mm Body, TDFN-EP, Pb-Free", PackageReference=T833+2, PackageVersion="revJ, 2009"
U6: "Miniature Single-Cell, Fully Integrated Li-Ion, Li-Polymer Charge Management Controller, 4.2V, 5-Pin SOT-23, Industrial Temperature, Tape and Reel", Manufacturer=Microchip, Supplier Part Number 1=MCP73832T-2DFI/OTTR-ND, Code_IPC=SOT23-5, ComponentLink1Description="Manufacturer URL", ComponentLink1URL=http://www.microchip.com/, ComponentLink2Description=Datasheet, ComponentLink2URL=http://ww1.microchip.com/downloads/en/DeviceDoc/21984e.pdf, ComponentLink3Description="Package Specification", ComponentLink3URL=http://www.microchip.com/stellent/groups/techpub_sg/documents/packagingspec/en012702.pdf, DatasheetVersion="revE, Sep-2008", Mounting Technology="Surface Mount", PackageDescription="5-Lead Plastic Small Outline Transistor (OT) [SOT-23]", PackageReference=SOT-23-OT5, PackageVersion="revBB, Aug-2009", PartNumber=MCP73832T-2DFI/OT, Supplier 1=Digi-Key, Supplier 2=Digi-Key, Supplier 3=Digi-Key, Supplier 4=Newark, Supplier 5=Mouser, Supplier Part Number 2=MCP73832T-2DFI/OTCT-ND, Supplier Part Number 3=MCP73832T-2DFI/OTDKR-ND, Supplier Part Number 4=08R1849, Supplier Part Number 5=579-MCP73832T2DFI/OT
Y1: "Surface Mount Quartz Crystal", PackageDocument=9-Sep-1999, ComponentLink1Description="Manufacturer Link", ComponentLink1URL=http://www.cmac.com/mt/, DatasheetDocument=9-Sep-1999, Note="PCB layout complies with manufacturer's recommendation.", PackageReference=4SMX, Published=17-Jul-2002, Publisher="Altium Limited"

## Via types
v1: diameter 27.56, hole 15.75, Top Layer to Bottom Layer, 66 vias
v2: diameter 19.68, hole 7.87, Top Layer to Bottom Layer, 4 vias

## Nets (pads, with @x,y where several pads share a name; then routed paths per layer and width w, separated by ;. In a path a pad name is that pad's centre, name@x,y a point inside that pad or via, vN(x,y) a via of type N, cw(c..) or ccw(c..) an arc to the next point about the centre after c; other vN are vias at no path point)
3V3: C4.2 C5.2 C6.2 C7.2 C8.2 C9.2 H1.1 H1.4 H1.8 P4.1 P5.2 P7.1 P8.1 R1.2 R11.1 R14.2 R25.1 R33.2 U1.1 U1.5 U1.17 | length 5909.1
  Top Layer w8: P7.1 P8.1 584.8,538 649.8,603 731.01,603 736.01,608 v1(784.8,608) 794.17,598.63 R33.2 ; 934.8,878 934.8,824.37 U1.1 970.44,638.21 C9.2 C8.2 1021.85,558 1191.85,388 1241.85,388 1294.8,440.95 1294.8,508 v1(1284.8,518) ; C7.2 1793.93,248.87 ; H1.8 1912.44,855.64 1924.8,868 1924.8,1028 ; H1.4 1923.93,1028.87 1924.8,1028 ; H1.1 1894.01,1158.79 1924.8,1128 1924.8,1028
  Top Layer w10: R14.2 596.06,1279.26 624.8,1308 P4.1 C5.2 R11.1 894.17,1388 ; 934.8,878 959.8,903 ; U1.5 1009.34,928 984.8,928 959.8,903 ; R25.1 1044.8,1396.74 1036.06,1388 894.17,1388 ; 1544.8,888 1544.8,1068 1584.8,1108 1634.8,1108 1713.93,1028.87 ; P5.2 1793.93,268.87 1793.93,248.87 ; 894.17,1388 894.17,1328.24 C6.2 C6.2 U1.17 934.8,1136.17 v1(934.8,1058) 934.8,928 959.8,903
  Top Layer w20: 1544.8,888 1429.37,772.57 C4.2 1429.37,653.43 v1(1504.8,578) 1504.8,518 1664.8,358 R1.2 P5.2 ; 1713.93,1028.87 H1.4
  Bottom Layer w8: v1(784.8,608) 784.8,968 874.8,1058 v1(934.8,1058) ; v1(1284.8,518) 1344.8,578 v1(1504.8,578)
+5V: C14.2 D1.2 J1.1 P2.1 P3.1 P6.2 Q1.1 Q3.1 R4.2 R6.1 R10.2 R12.1 R19.2 R20.2 R32.2 U2.3 U4.4 U6.4 | length 6240.2
  Top Layer w8: R10.2 204.17,1927.37 224.8,1948 293.8,1948 ; U4.4 244.8,1899 293.8,1948 ; D1.2 644.8,1948 ; v1(1444.8,1568) 1434.8,1558 1294.8,1558 1234.8,1618 1234.8,1658 1074.8,1818 1044.8,1818 1034.8,1828 1034.8,1878 1004.8,1908 Q1.1 984.8,1928 964.8,1948 644.8,1948 ; 293.8,1948 644.8,1948
  Top Layer w10: Q3.1 677.4,209.97 R32.2 675.43,47.37 694.8,28 934.8,28 954.8,48 P6.2 ; R20.2 R19.2 1583.54,1819.26 1604.8,1798 v1(1604.8,1608)
  Top Layer w20: v1(154.8,158) 154.8,227.37 R12.1 154.17,308.63 R4.2 ; v1(1434.8,878) 1434.8,1168 1554.8,1288 v1(1554.8,1368)
  Bottom Layer w20: P2.1 v1(154.8,158) 154.8,118 244.8,28 924.8,28 954.8,58 P6.2 954.8,198 1184.8,428 1484.8,428 1619.8,563 1619.8,773 1574.8,818 1494.8,818 v1(1434.8,878) ; v1(1554.8,1368) 1554.8,1579.37 1550.48,1583.68 1554.8,1588
  other v1: 1474.8,1568 1504.8,1568 1604.8,1568 1474.8,1608 1504.8,1608
CLK: H1.5 P5.5 U1.11 | length 1542.8
  Top Layer w8: 1707.24,985.56 1707.24,885.56 1784.8,808 1894.8,808 1924.8,778 1924.8,538 1884.8,498 P5.5
  Top Layer w10: U1.11 1124.8,1108.73 1164.07,1108.73 1224.8,1048 v1(1254.8,1048) ; v1(1594.8,1058) 1634.8,1058 1707.24,985.56 H1.5
  Bottom Layer w10: v1(1254.8,1048) 1584.8,1048 v1(1594.8,1058)
En_5v: U1.8 U3.4 | length 1321.3
  Top Layer w8: U3.4 1132.2,1690.6 v1(1144.8,1678) ; U1.8 1192.97,878 1324.8,878 1364.8,918 1364.8,1087.6 v1@1194.8,1257.6
  Bottom Layer w8: v1(1144.8,1678) 1144.8,1418 1194.8,1368 v1(1194.8,1258)
EXT_BUTON: R1.1 SW1.2 | length 222.6
  Top Layer w8: SW1.2@1544.17,349.26 SW1.2
  Top Layer w10: SW1.2@1544.17,349.26 1544.17,268.63 1593.54,219.26 R1.1
GND: BT1.2 C1.1 C2.1 C4.1 C5.1 C6.1 C7.1 C8.1 C9.1 C10.1 C11.1 C12.1 C14.1 C15.1 C16.2 C17.1 H1.6 J1.4 J1.5 J1.6 J1.7 J1.8 J1.9 LD1.1 LD2.1 LD4.1 LD5.1 LD6.1 P2.4 P2.6 P2.8 P2.10 P2.12 P2.14 P2.16 P2.18 P2.20 P5.1 P7.2 P8.2 Q2.2 Q4.2 R2.1 R3.2 R6.2 R7.2 R10.1 R12.2 R22.2 R23.2 R24.1 R37.2 SW1.1 U1.16 U1.32 U2.1 U2.7 U2.9 U3.2 U4.2 U5.2 U6.2 | length 776.3
  Top Layer w8: v1(244.8,1268) 257.42,1268 273.56,1284.14 313.86,1284.14 LD2.1 ; v1(664.8,1298) 715.67,1298 C5.1 ; U1.32 893.88,643.48 C9.1 C8.1 ; R37.2 1014.17,280.6 Q4.2 ; Q4.2@1024.8,279.97 Q4.2@1027.4,277.37
  Top Layer w10: C6.1 970.44,1322.36 U1.16 ; J1.5@1651.37,1718.59 J1.5@1651.8,1718.59
  Top Layer w20: 299.8,1120 299.8,1090 309.8,1080 317.1,1080 386.1,1149
  other v1: 1433.8,218 1507.8,223 1202.8,587 1674.8,1198 1674.8,1269 1893.8,1269 1742.8,1270 1814.8,1271 1664.8,1378 244.8,1428 324.8,1428 404.8,1428 75.8,1519 77.8,1600 1324.8,1758
  other v2: 2476.6,95.47 2455.93,130.9 2497.27,130.9 2476.6,166.33
HFXTAL_N: C2.2 U1.3 Y1.2 | length 370.4
  Top Layer w10: U1.3 1060.26,788 1127.51,788 Y1.2 1293.33,622.18 C2.2 ; C2.2@1297.51,618 C2.2@1299.8,618
HFXTAL_P: C1.2 U1.2 Y1.1 | length 393.4
  Top Layer w10: U1.2 992.71,810.09 1034.8,768 1034.8,641.29 Y1.1 1073.95,593.85 C1.2 C1.2@1174.8,493
IRQ: P5.8 U1.20 | length 1721.6
  Top Layer w8: v1(684.8,1208) 684.8,1178 704.8,1158 779.34,1158 U1.20
  Bottom Layer w8: v1(684.8,1208) 724.8,1168 1034.8,1168 1204.8,998 1686.8,998 1714.8,970 1714.8,648 P5.8
MISO: H1.7 P5.7 U1.12 | length 444.4
  Top Layer w8: v1(1794.8,898) 1795.74,898.94 H1.7
  Bottom Layer w8: v1(1794.8,898) 1864.8,898 P5.7
MOSI: H1.3 P5.6 U1.13 | length 1800.7
  Top Layer w10: U1.13 1084.98,1158 1204.8,1158 v1(1254.8,1108) ; v1(1704.8,1108) 1740.63,1072.17 H1.3
  Bottom Layer w8: v1(1704.8,1108) 1864.8,1108 1924.8,1048 1924.8,568 1904.8,548 1814.8,548 P5.6
  Bottom Layer w10: v1(1254.8,1108) v1(1704.8,1108)
NetC3_1: C3.1 R2.2 SW2.1 U1.31 | length 1184.8
  Top Layer w8: U1.31 844.8,784.19 844.8,535.05 881.85,498 1023.8,498 1164.8,357 1164.8,258 1215.43,207.37 R2.2 1335.43,207.37 1384.8,158 SW2.1
  Top Layer w10: R2.2 C3.1
NetC10_2: C10.2 D3.1 P3.2 R5.1 | length 948.2
  Top Layer w10: v1(764.8,1468) D3.1 ; R5.1 953.54,1606.74 v1(974.8,1628) 1154.8,1628 1194.8,1588 C10.2@1194.8,1545.4
  Bottom Layer w10: v1(764.8,1468) 934.8,1468 974.8,1508 v1(974.8,1628) 1004.8,1628 1034.8,1658 P3.2 P3.2@1034.8,1758
NetC13_1: C13.1 R15.2 R22.1 U5.6 | length 566
  Top Layer w8: R15.2 483.54,1596.74 C13.1 ; R22.1 C13.1 ; C13.1@492.2,1608 C13.1@494.8,1605.4 ; v1(554.8,1598) C13.1 ; v1(564.8,1868) 570,1862.8 U5.6
  Bottom Layer w8: v1(554.8,1598) 554.8,1688 564.8,1698 v1(564.8,1868)
NetC13_2: C13.2 C15.2 L2.2 P4.2 R17.1 | length 663.6
  Top Layer w8: C13.2@494.8,1523.2 494.8,1530.6 644.17,1530.6 L2.2
  Top Layer w10: R17.1 244.8,1488 254.8,1478 484.8,1478
  Top Layer w20: C15.2 R17.1 ; C13.2 484.8,1478 484.8,1448 524.8,1408 P4.2
NetD3_2: D3.2 L1.2 U3.1 | length 185.2
  Top Layer w10: D3.2 L1.2 807.48,1765.4 U3.1
NetL2_1: L2.1 U5.3 | length 110
  Top Layer w8: L2.1 U5.3
NetLD1_2: LD1.2 R4.1 | length 80
  Top Layer w8: LD1.2 R4.1
NetLD2_2: LD2.2 R14.1 | length 100
  Top Layer w8: LD2.2 R14.1
NetLD3_1: LD3.1 Q2.1 R19.1 U6.1 | length 1860.8
  Top Layer w10: Q2.1 v1(1262.2,1485.4) ; LD3.1 1289.6,1818 1244.8,1818 ; U6.1 1329.8,1693 1244.8,1778 1244.8,1818 ; v1(1564.8,1898) R19.1 1479.8,1923 1454.8,1948 1278.31,1948 1244.8,1914.49 1244.8,1818
  Bottom Layer w10: v1(1262.2,1485.4) 1262.2,1298 1292.2,1268 1344.8,1268 1374.8,1298 1374.8,1828 1444.8,1898 v1(1564.8,1898)
NetLD3_2: LD3.2 R20.1 | length 90
  Top Layer w10: LD3.2 R20.1
NetLD4_2: LD4.2 R26.1 | length 406.4
  Top Layer w8: LD4.2 294.8,788 374.8,868 R26.1
NetLD5_2: LD5.2 R27.1 | length 253.9
  Top Layer w8: LD5.2 384.8,738 434.8,788 R27.1
NetLD6_2: LD6.2 R28.1 | length 100.6
  Top Layer w8: LD6.2 R28.1
NetP6_1: P6.1 Q4.3 R35.2 | length 220.6
  Top Layer w10: R35.2 Q4.3 P6.1
NetP6_3: P6.3 R34.2 | length 100.6
  Top Layer w10: P6.3 R34.2
NetP6_4: P6.4 Q3.2 R32.1 | length 181.7
  Top Layer w8: Q3.2 752.2,209.97 R32.1 754.17,98.63 P6.4
NetQ2_3: Q2.3 R25.2 U1.15 | length 358.9
  Top Layer w10: U1.15 1034.8,1196.9 1034.8,1298 1054.8,1318 R25.2 Q2.3
NetQ3_3: Q3.3 R33.1 U1.25 | length 729
  Top Layer w10: v1(684.8,998) 684.8,997.82 U1.25 ; Q3.3 714.8,437.37 R33.1 715.43,527.37 v1(714.8,528)
  Bottom Layer w10: v1(684.8,998) 714.8,968 v1(714.8,528)
NetQ4_1: Q4.1 R36.1 | length 213.6
  Top Layer w10: R36.1 1043.17,438 1092.2,388.97 Q4.1 Q4.1@1094.8,279.97
NetR3_1: R3.1 U2.2
NetR5_2: R5.2 R9.1 U3.3 | length 225.6
  Top Layer w8: U3.3 867.56,1605.24 874.8,1598 R5.2 R9.1
NetR7_1: R7.1 R8.1 | length 80.3
  Top Layer w10: R8.1 1104.17,1546.74 R7.1@1104.8,1547.37
NetR8_2: R8.2 R9.2 | length 71.3
  Top Layer w10: 973.54,1468 R8.2 R8.2@1044.8,1468
NetR11_2: R11.2 U1.14 U4.3 | length 1570
  Top Layer w8: U4.3 v1(339.29,1908) ; R11.2@814.17,1308.63 814.17,1278.63 v1(844.8,1248) ; U1.14 1084.8,1202.36 v1(1084.8,1248)
  Bottom Layer w8: v1(339.29,1908) 339.29,1579.51 385.15,1533.65 644.8,1533.65 694.8,1483.65 694.8,1338 784.8,1248 v1(844.8,1248) 1083.54,1248 1084.17,1248.63 v1(1084.8,1248)
NetR13_1: R13.1 U5.5 | length 250.4
  Top Layer w8: R13.1@502.54,1849 R13.1 494.8,1888 513.8,1907 595.8,1907 607.4,1895.4 U5.5
NetR15_1: R15.1 R16.1 | length 80
  Top Layer w8: R16.1 R15.1
NetR16_2: R16.2 R17.2 | length 80
  Top Layer w8: R17.2 R16.2
NetR18_1: R18.1 R21.2 R24.2 | length 180
  Top Layer w8: R18.1 R21.2 R24.2
NetR21_1: R21.1 U1.6 | length 903.2
  Top Layer w10: U1.6 1123.88,858 1334.8,858 1394.8,918 1394.8,1239.53 1484.8,1329.53 R21.1
NetR23_1: R23.1 U6.5 | length 75.4
  Top Layer w10: U6.5 1424.8,1673.32 R23.1
NetR26_2: R26.2 U1.26 | length 128.6
  Top Layer w8: R26.2 662.17,876 713.9,876 U1.26
NetR27_2: R27.2 U1.27 | length 189.1
  Top Layer w8: R27.2 694.8,788 724.8,818 724.8,842.36 U1.27
NetR28_2: R28.2 U1.28 | length 295.3
  Top Layer w8: R28.2 744.8,698 754.8,708 754.8,827.82 U1.28
NetR34_1: R34.1 R35.1 U1.7 | length 1080.2
  Top Layer w10: v1(854.8,348) R34.1 R35.1 ; v1(994.8,1018) 1008.43,1018 U1.7
  Bottom Layer w10: v1(854.8,348) 854.8,968 874.8,988 964.8,988 v1(994.8,1018)
NetR36_2: R36.2 R37.1 U1.21 | length 1876.9
  Top Layer w8: v1(344.8,1048) 344.8,1078 394.8,1128 764.8,1128 U1.21 ; v1(794.8,348) 884.8,438 R36.2
  Top Layer w10: R37.1@935.43,368 936.06,368.63 R36.2@936.06,448
  Bottom Layer w8: v1(344.8,1048) 344.8,448 384.8,408 624.8,408 684.8,348 v1(794.8,348)
NetU1_9: U1.9
NetU1_22: U1.22
Reset: C3.2 P2.15 SW2.2 U1.4 | length 2295.4
  Top Layer w8: C3.2 SW2.2 1384.8,428 1417.86,461.06 1417.86,582.31
  Top Layer w10: U1.4 1064.8,828 1224.8,828 v1(1334.8,718) 1334.8,665.37 1417.86,582.31
  Bottom Layer w10: P2.15 244.8,1128 954.8,1128 1334.8,748 v1(1334.8,718)
RF_CE: P5.3 U1.18 | length 1987.8
  Top Layer w8: v1(614.8,1208) 614.8,1238 634.8,1258 768.43,1258 U1.18 ; v1(1574.8,648) 1574.8,568 1694.8,448 1834.8,448 1864.8,418 P5.3
  Bottom Layer w8: v1(614.8,1208) 614.8,1198 664.8,1148 957.43,1148 1307.43,798 1354.8,798 1504.8,648 v1(1574.8,648)
RF_CS: P5.4 U1.10 | length 1261.3
  Top Layer w8: U1.10 1138.61,1078 1164.8,1078 1254.8,988 v1(1254.8,938)
  Bottom Layer w8: v1(1254.8,938) 1644.8,938 1684.8,898 1684.8,428 1714.8,398 P5.4
SCL: P7.3 P8.3 U1.29 | length 1672.5
  Top Layer w8: P8.3 P7.3 384.8,68 344.8,28 244.8,28 224.8,48 224.8,478 314.8,568 504.8,568 574.8,638 710.26,638 772.8,700.54 772.8,801.27 U1.29
SD_CS: H1.2 U1.19 | length 1278.1
  Top Layer w8: v1(754.8,1208) 773.88,1208 U1.19 ; v1(1534.8,1148) 1764.8,1148 1797.32,1115.48 H1.2
  Bottom Layer w8: v1(754.8,1208) 1242,1208 1302,1148 v1(1534.8,1148)
SDA: P7.4 P8.4 U1.30 | length 1133.1
  Top Layer w8: P7.4 P8.4 284.8,458 374.8,548 514.8,548 584.8,618 724.8,618 814.8,708 814.8,798.73 U1.30
SWCLK: P2.9 U1.24 | length 676.7
  Top Layer w10: P2.9 291.17,918 398.8,1025.63 398.8,1032 444.8,1078 681.17,1078 U1.24
SWDIO: P2.7 U1.23 | length 853.3
  Top Layer w10: P2.7 v1(254.8,818) ; v1(254.8,968) 317.13,968 381.8,1032.67 381.8,1055 434.8,1108 695.72,1108 U1.23
  Bottom Layer w10: v1(254.8,818) v1(254.8,968)
VBat: BT1.1 C16.1 Q1.3 R18.2 U2.4 U2.8 U4.5 U6.3 | length 2527.4
  Top Layer w10: 1294.8,1598 U6.3
  Top Layer w20: BT1.1 C16.1 U4.5 ; Q1.3 1172.2,1870.6 1204.8,1838 v1(1204.8,1818) 1204.8,1778 1264.8,1718 1264.8,1628 1294.8,1598 ; v1(1324.8,1388) 1365.43,1428.63 R18.2
  Bottom Layer w20: BT1.1 74.8,1844 180.8,1950 1142.8,1950 1204.8,1888 v1(1204.8,1818) 1204.8,1792.05 1324.8,1672.05 v1(1324.8,1388)
VSup: C11.2 C12.2 C17.2 D1.1 L1.1 Q1.2 R13.2 U2.5 U3.5 U4.1 U5.1 U5.4 | length 1335.7
  Top Layer w10: U5.1 570,1684.54 v1(594.8,1659.73) ; U5.4 834.01,1812.49 834.8,1813.28 ; v1(714.8,1888) D1.1 C11.2 837.4,1815.87 834.8,1813.28 ; U3.5 962.04,1785.24 984.8,1808 Q1.2 890,1833.2 870.08,1813.28 834.8,1813.28
  Top Layer w20: C12.2 339.6,1777.68 U4.1 C17.2 R13.2 494.8,1748 524.8,1718 U5.1
  Bottom Layer w10: v1(594.8,1659.73) 594.8,1698 654.8,1758 654.8,1848 694.8,1888 v1(714.8,1888)
pads on no net: J1.2 J1.3 J1.MH1 J1.MH2 P2.2 P2.3 P2.5 P2.11 P2.13 P2.17 P2.19 U2.6

## Polygon pours and split planes (outlines as drawn)
NetL2_1 on Top Layer "NONET_L01_P012" (solid, remove dead copper, shelved, pour order 12): 644.8,1718 614.8,1688 614.8,1578 674.8,1578 674.8,1688
+5V on Top Layer "NONET_L01_P000" (solid, shelved, pour order 0): 1404.8,1623 1654.8,1623 1679.8,1598 1729.8,1598 1729.8,1548 1379.8,1548 1379.8,1598
GND on Top Layer "NONET_L01_P013" (solid, remove dead copper, shelved, pour order 13): 0.1,0 0.1,1966.6 1960.25,1966.6 1960.4,0
VSup on Top Layer "NONET_L01_P016" (solid, remove dead copper, shelved, pour order 16): 644.8,1812.49 647.36,1809.93 909.8,1809.93 909.8,1833 934.8,1858 940.79,1852.01 1012.47,1852.01 1012.47,1705.67 1004.8,1698 884.8,1698 794.8,1788 644.8,1788
3V3 on Top Layer "NONET_L01_P018" (solid, remove dead copper, shelved, pour order 18): 564.8,1328 564.8,1358 564.8,1448 684.8,1448 686.1,1449.3 1163.5,1449.3 1174.8,1438 1174.8,1418 1174.8,1358 1024.8,1358 989.8,1323
GND on Bottom Layer "NONET_L02_P020" (solid, remove dead copper, shelved, pour order 20): 0.1,0 0.1,1966.6 1960.25,1966.6 1960.4,0
+5V on Bottom Layer "NONET_L02_P002" (solid, shelved, pour order 2): 1404.8,1623 1654.8,1623 1679.8,1598 1729.8,1598 1729.8,1548 1379.8,1548 1379.8,1598

## Silkscreen, mask and mechanical layers (free items; w line width, h text height)
Top Overlay:
  text "G&E Corp." at 229.8,1076.26 h100
  text "RF YAN / KART v1.0" at 239.8,425 h80
Mechanical 3:
  lines w0.5: -2766.48,1036.3 -2709.39,1036.3 -2610.97,1036.3 ; -2610.97,880.78 -2610.97,937.87 -2610.97,1036.3 ; -2610.97,1191.81 -2610.97,1134.72 -2610.97,1036.3 ; -2455.46,1036.3 -2512.54,1036.3 -2610.97,1036.3 ; -652.31,1036.3 -595.22,1036.3 -496.8,1036.3 ; -496.8,880.78 -496.8,937.87 -496.8,1036.3 ; -496.8,1191.81 -496.8,1134.72 -496.8,1036.3 ; -341.28,1036.3 -398.37,1036.3 -496.8,1036.3 ; -77.51,1006.77 -77.51,1065.82
Mechanical 13:
  lines w1: 121.19,1966.78 cw(c62.09,1966.15) 2.99,1966.78 -0.02,1966.78 0,1966.75 0,1329.2 0,0 2.31,0 cw(c61.4,0.63) 120.5,0 1577.12,0 ; 1577.2,0.01 cw(c1636.3,0.01) 1695.4,0.01 ; 1695.32,1966.7 cw(c1636.23,1966.07) 1577.13,1966.7 121.26,1966.7 ; 1695.47,-0.07 1960.4,-0.07 1960.4,1966.7 1695.48,1966.7 ; 121.26,1966.7 121.26,1966.7

## Text inside footprints (layer, text, board x,y; h text height)
BT1: Top Overlay "+" at 64.8,1858 h45 r270
P2: Top Overlay "20" at 54.8,1478 h45 r90; Top Overlay "19" at 174.8,1478 h45 r90; Top Overlay "1" at 174.8,438 h45 r90; Top Overlay "2" at 64.8,438 h45 r90
P5: Top Overlay "2" at 1754.8,218 h45 r90; Top Overlay "1" at 1884.8,218 h45 r90; Top Overlay "7" at 1884.8,658 h45 r90; Top Overlay "8" at 1784.8,658 h45 r90